# Altium PCB Duplexer.PcbDoc
Units mm, origin at the board's own origin, x right, y up, seen from the top; angles counter-clockwise.
Board outline 50 x 50 mm, 2 copper layers (Top Layer, Bottom Layer); 13 components, 8 nets, 35 pads, 20 vias.
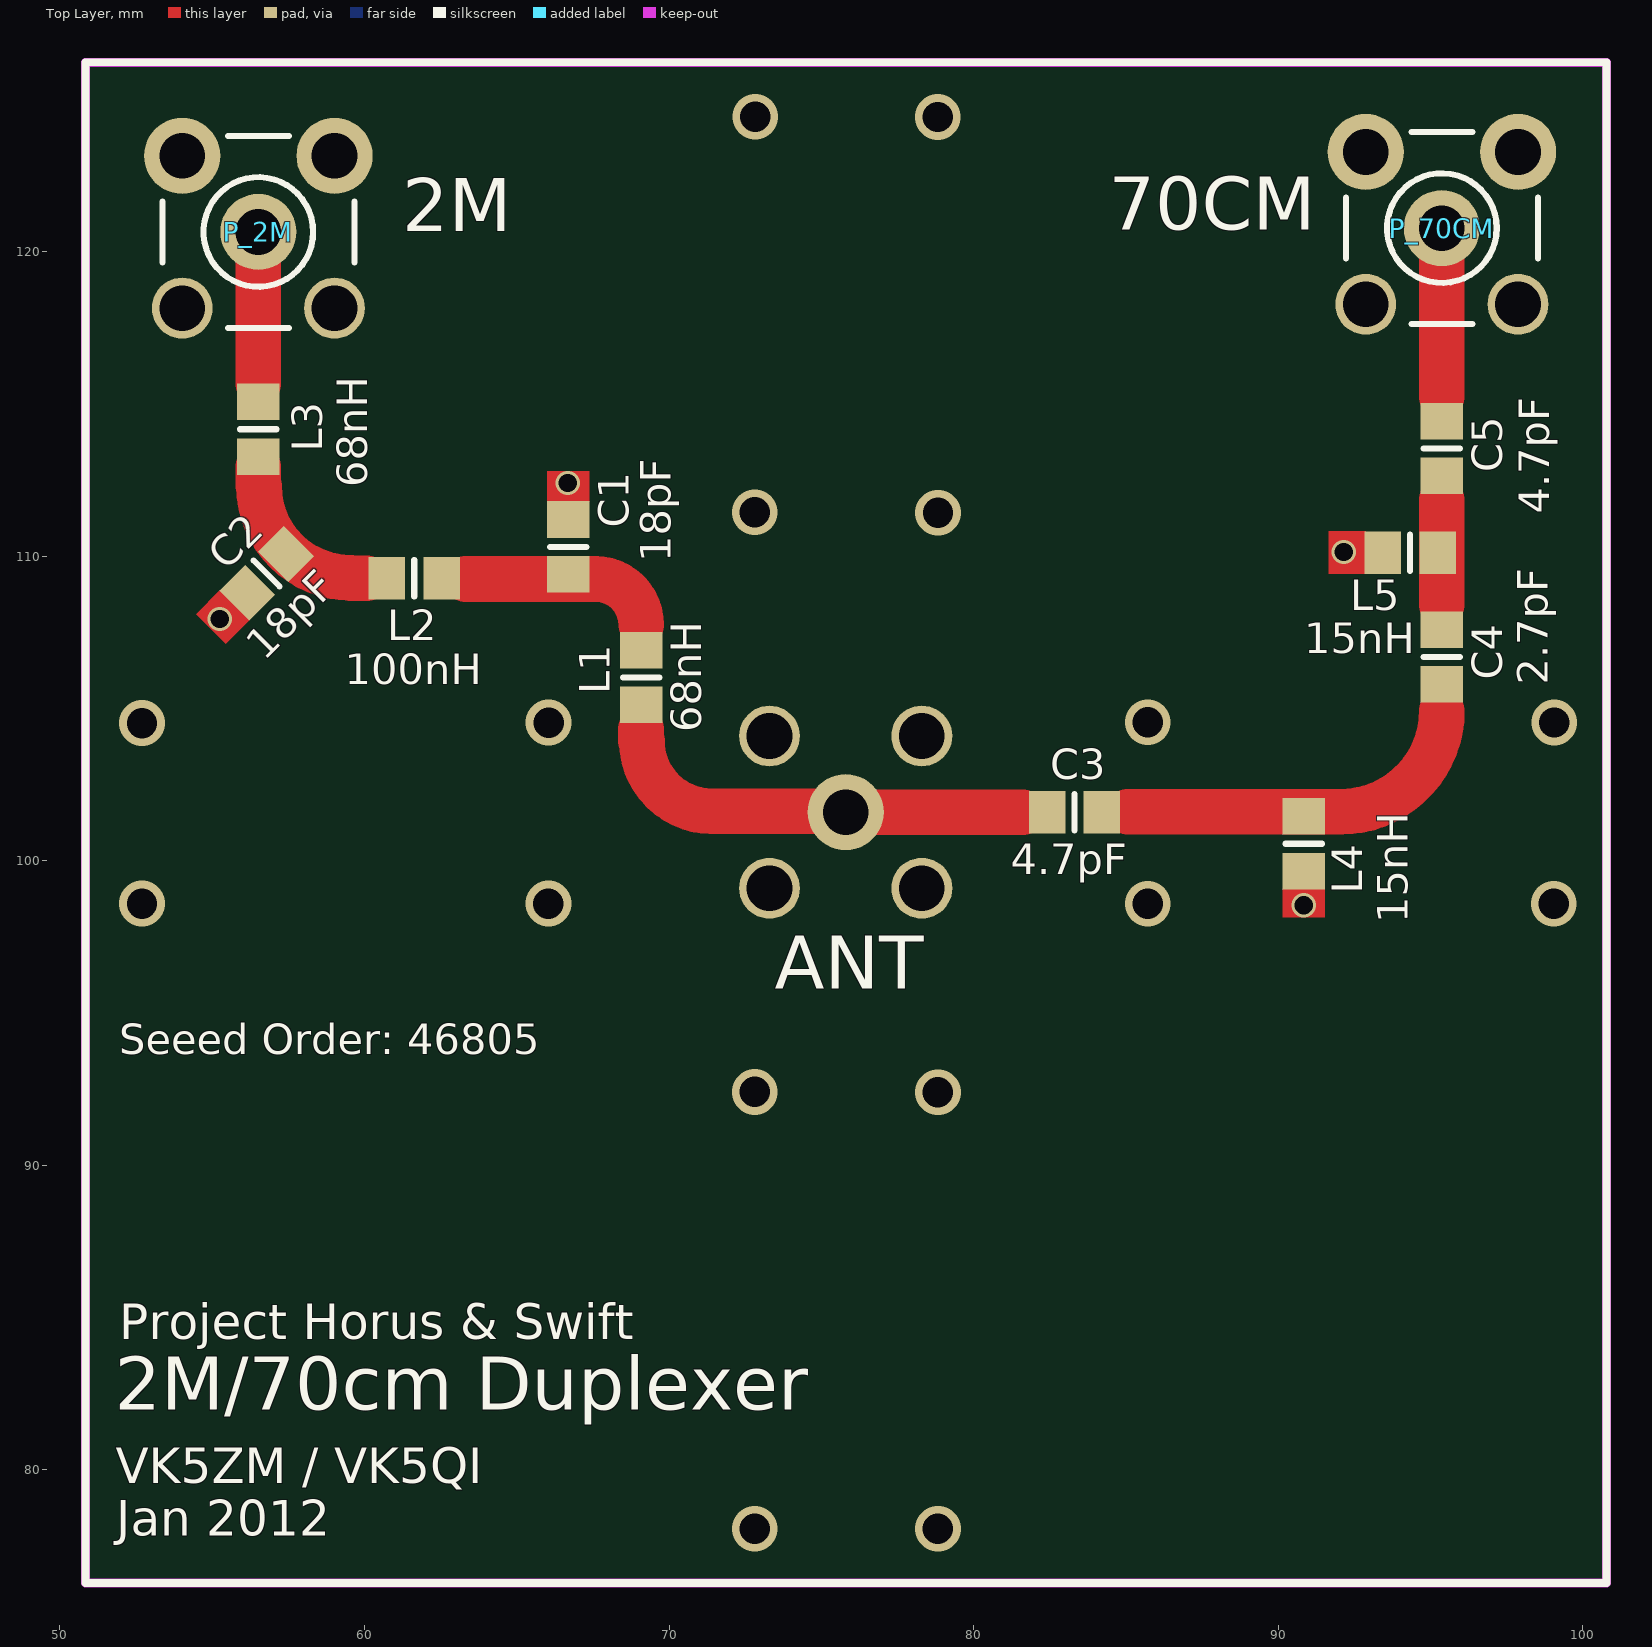
[diagram p0: Top Layer view]
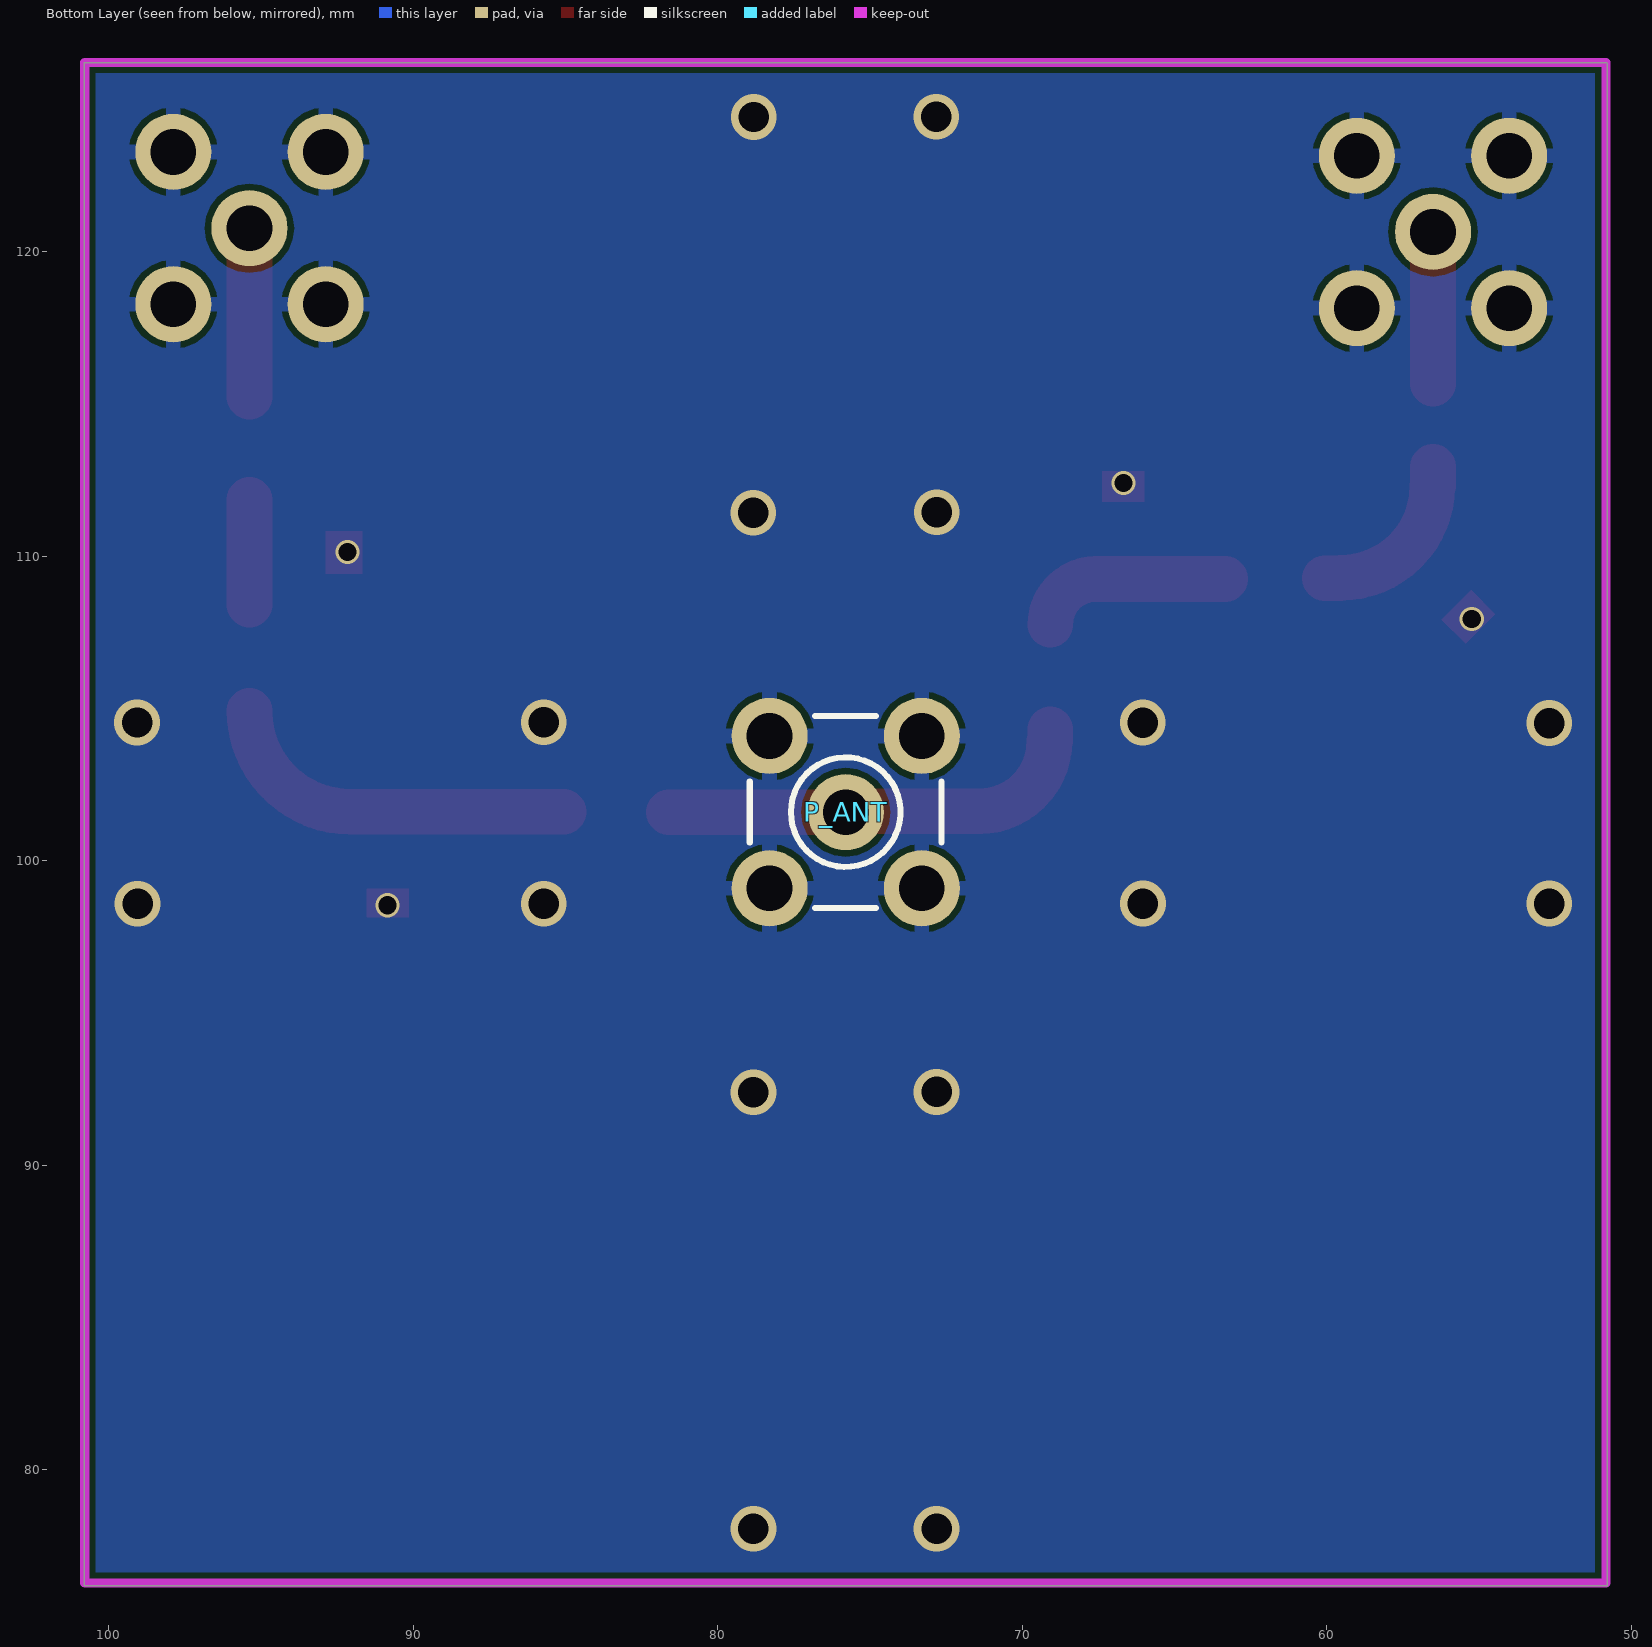
[diagram p1: Bottom Layer view, seen from below]

## Layer stack, top to bottom
Top Layer: signal copper 0.0356
Dielectric: dielectric 0.32, FR-4, Dk 4.8
Bottom Layer: signal copper 0.0356

## Board outline
50.8,76.2 100.8,76.2 100.8,126.2 50.8,126.2

## Design rules (kind name [scope] priority, off if disabled: settings)
Clearance [All] p1: gap=0.2
PolygonConnect PolygonConnect_1 [IsVia] p1: connectstyle=Direct reliefconductorwidth=0.254 reliefentries=4 polygonreliefangle="90 Angle"
PolygonConnect [All] p2: connectstyle=Relief reliefconductorwidth=0.5 reliefentries=4 polygonreliefangle="90 Angle"
RoutingVias [All] p1: holewidth=0.635 width=0.8 viastyle="Through Hole" minholewidth=0.711 minwidth=1.27 maxholewidth=0.711 maxwidth=1.27
SilkscreenOverComponentPads [All] p1: minsilkscreentomaskgap=0.254
SolderMaskExpansion [All] p1: expansion=0.102
Width [All] p1: maxlimit=10 minlimit=0.2 preferedwidth=2.76
27 further rules are at their usual default settings.

## Components (designator, comment, footprint, x,y, rotation, side; value= is the part's Value field where it differs from the comment)
C1 "Cap Semi" 6-0805_N 66.687,110.308 r270 top
C2 "Cap Semi" 6-0805_N 56.784,109.438 r45 top
C3 "Cap Semi" 6-0805_N 83.312,101.6 r180 top
C4 "Cap Semi" 6-0805_N 95.376,106.694 r270 top
C5 "Cap Semi" 6-0805_N 95.372,113.54 r270 top
L1 "Inductor" 6-0805_N 69.081,106.019 r90 top
L2 "Inductor" 6-0805_N 61.634,109.278 r180 top
L3 "Inductor" 6-0805_N 56.515,114.173 r90 top
L4 "Inductor" 6-0805_N 90.839,100.562 r90 top
L5 "Inductor" 6-0805_N 94.336,110.122 r0 top
P_2M "SMB" SMB_V-RJ45#1 56.515,120.65 r0 top
P_70CM "SMB" SMB_V-RJ45#1 95.377,120.777 r0 top
P_ANT "SMB" SMB_V-RJ45#2 75.8,101.6 r180 bottom

## Footprints (in the part's own frame and the unit in brackets; to place one, negate y for a bottom-side part, rotate by r counter-clockwise, add the part's x,y. Pads: shape width x height; smd on the part's side, far side on the other; paste and mask are expansions set on the pad)
6-0805_N [mm] "Chip Resistor, Body 2.0x1.2mm, IPC Medium Density"
  rect 1.2x1.4 smd: 1(-0.9,0) 2(0.9,0)
  silkscreen extent 0,-0.6 0,0.6, body extent -1.07,-0.7 1.07,0.7, height 0.7
SMB_V-RJ45#1 [mm] "Connector; SMB Straight"
  round 2.5 hole 1.5: 1(0,0) 2(-2.5,2.5) 2(2.5,2.5)
  round 2 / inner round 2.5 / far side round 2.5 hole 1.5: 2(-2.5,-2.5) 2(2.5,-2.5)
  silkscreen extent -3.15,-3.15 3.15,3.15
SMB_V-RJ45#2 [mm] "Connector; SMB Straight"
  round 2.5 hole 1.5: 1(0,0)
  round 2.5 / inner round 2.5 / far side round 2 hole 1.5: 2(-2.5,-2.5) 2(-2.5,2.5) 2(2.5,-2.5) 2(2.5,2.5)
  silkscreen extent -3.15,-3.15 3.15,3.15

## Part data
C1 C2 C3 C4 C5: "Capacitor (Semiconductor SIM Model)"
P_2M P_70CM P_ANT: "SMB Straight Connector"

## Via types
v1: diameter 1.5, hole 1, Top Layer to Bottom Layer, 16 vias
v2: diameter 0.8, hole 0.6, Top Layer to Bottom Layer, tented both sides, 4 vias

## Nets (pads, with @x,y where several pads share a name; then routed paths per layer and width w, separated by ;. In a path a pad name is that pad's centre, name@x,y a point inside that pad or via, vN(x,y) a via of type N, cw(c..) or ccw(c..) an arc to the next point about the centre after c; other vN are vias at no path point)
GND: C1.1 C2.1 L4.1 L5.1 P_2M.2 P_70CM.2 P_ANT.2
  other v1: 72.816,78.074 78.829,78.074 72.816,92.411 78.829,92.402 52.694,98.599 66.04,98.599 85.713,98.591 99.052,98.591 52.694,104.525 66.043,104.542 85.713,104.552 99.069,104.544 78.831,111.426 72.809,111.452 72.829,124.428 78.82,124.425
  other v2: 90.845,98.543 55.247,107.942 92.158,110.143 66.676,112.408
NetC1_2: C1.2 L1.2 L2.1 | length 6.6
  Top Layer w1.5: 63.332,109.257 67.583,109.257 cw(c67.583,107.757) 69.083,107.757
NetC2_2: C2.2 L2.2 L3.1 | length 5.9
  Top Layer w1.5: L3.1@56.515,112.942 56.515,112.32 56.538,112.298 ccw(c59.538,112.298) 59.538,109.298 ; 59.558,109.278 60.068,109.278
NetC3_1: C3.1 C4.2 L4.2 | length 12.2
  Top Layer w1.5: 85.064,101.611 92.056,101.611 ccw(c92.056,104.931) 95.377,104.931
NetC3_2: C3.2 L1.1 P_ANT.1 | length 14.2
  Top Layer w1.5: 69.081,103.952 69.081,104.321 ; 69.109,103.925 ccw(c71.404,103.925) 71.404,101.63 75.77,101.63 P_ANT.1 81.605,101.6
NetC4_1: C4.1 C5.2 L5.2 | length 3.4
  Top Layer w1.5: 95.376,108.418 95.376,111.857
NetC5_1: C5.1 P_70CM.1 | length 5.5
  Top Layer w1.5: 95.377,115.243 P_70CM.1
NetL3_2: L3.2 P_2M.1 | length 5
  Top Layer w1.5: 56.515,115.674 P_2M.1

## Polygon pours and split planes (outlines as drawn)
GND on Bottom Layer "Top Layer-No Net" (solid, pour order 2): 50.839,126.22 50.839,76.291 100.784,76.291 100.784,126.22

## Keep-outs
Keep-Out Layer:
  lines w0.3: 50.839,76.291 50.839,126.22 100.784,126.22 100.784,76.291 50.839,76.291

## Other copper
Top Layer:
  rectangle net GND: 91.66,109.425 92.881,110.825
  rectangle net GND: 90.139,98.144 91.538,99.1
  rectangle net GND: 65.985,111.779 67.389,112.804
  region net GND: 55.447,107.113 56.25,107.916 55.259,108.906 54.457,108.104

## Silkscreen, mask and mechanical layers (free items; w line width, h text height)
Top Overlay:
  lines w0.254: 50.839,76.291 50.839,126.22 100.784,126.22 100.784,76.291 50.839,76.291
  text "70CM" at 84.431,120.142 h3
  text "2M" at 61.232,120.099 h3
  text "68nH" at 60.084,112.274 h1 r90
  text "4.7pF" at 98.899,111.396 h1 r90
  text "18pF" at 70.052,109.809 h1 r90
  text "15nH" at 90.864,106.815 h1
  text "18pF" at 56.705,106.535 h1 r45
  text "100nH" at 59.356,105.802 h1
  text "2.7pF" at 98.85,105.785 h1 r90
  text "68nH" at 71.059,104.229 h1 r90
  text "4.7pF" at 81.222,99.561 h1
  text "15nH" at 94.252,97.957 h1 r90
  text "ANT" at 73.477,95.224 h3
  text "Seeed Order: 46805" at 51.943,93.657 h1
  text "Project Horus & Swift" at 51.94,83.9 h2
  text "2M/70cm Duplexer" at 51.793,81.396 h3
  text "VK5ZM / VK5QI" at 51.839,79.167 h2
  text "Jan 2012" at 51.846,77.441 h2
Bottom Solder:
  rectangle: 81.261,97.743 100.79,105.397
  rectangle: 71.958,107.003 79.677,126.22
  rectangle: 50.839,97.743 70.214,105.397
  rectangle: 71.958,76.291 79.677,96.215
Mechanical 1:
  lines w0.254: 56.515,99.441 56.515,114.173 85.527,95.806
Drill Drawing:
  text ".LEGEND" at 106.68,95.72 h1.52 r90
  text "Drill Drawing." at 105.88,78.74 h1.52

## Dimensions
50.839,76.291 to 50.839,126.22 on Mechanical 1
50.839,76.291 to 100.784,76.291 on Mechanical 1
56.515,114.173 to 56.515,99.441 on Mechanical 1